# Altium PCB Cotton Candy -PCB.PcbDoc
Units mm, origin at the board's own origin, x right, y up, seen from the top; angles counter-clockwise.
Board outline 152.4 x 101.6 mm, 2 copper layers (Top Layer, Bottom Layer); 66 components, 58 nets, 277 pads, 0 vias.
Unrouted connection lines stored in the file: 172.
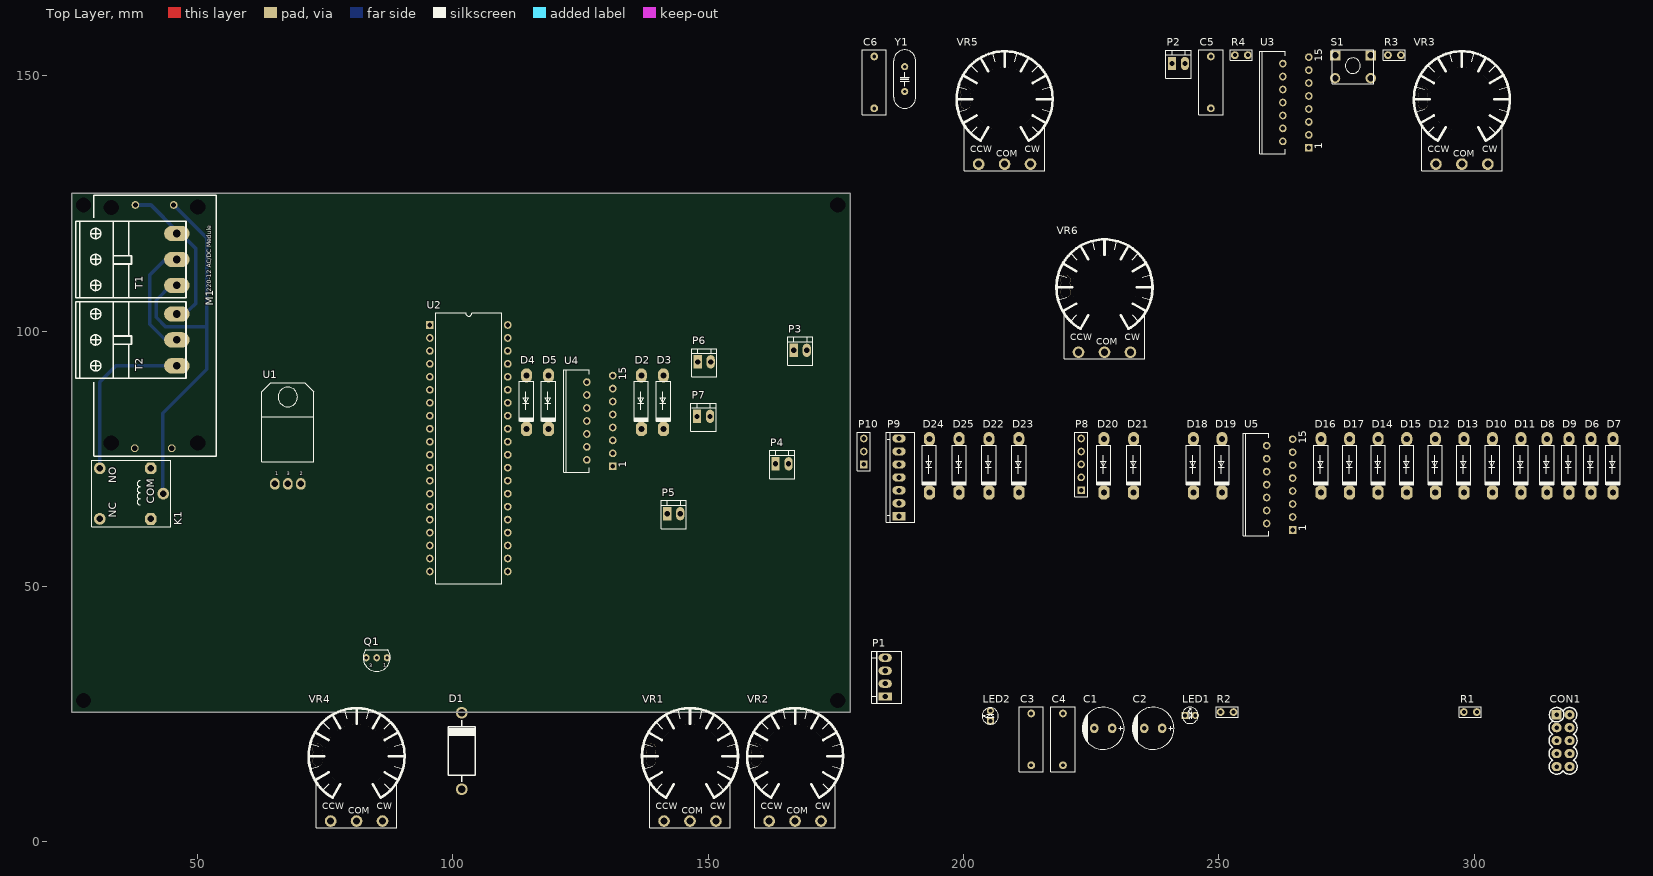
[diagram p0: Top Layer view]
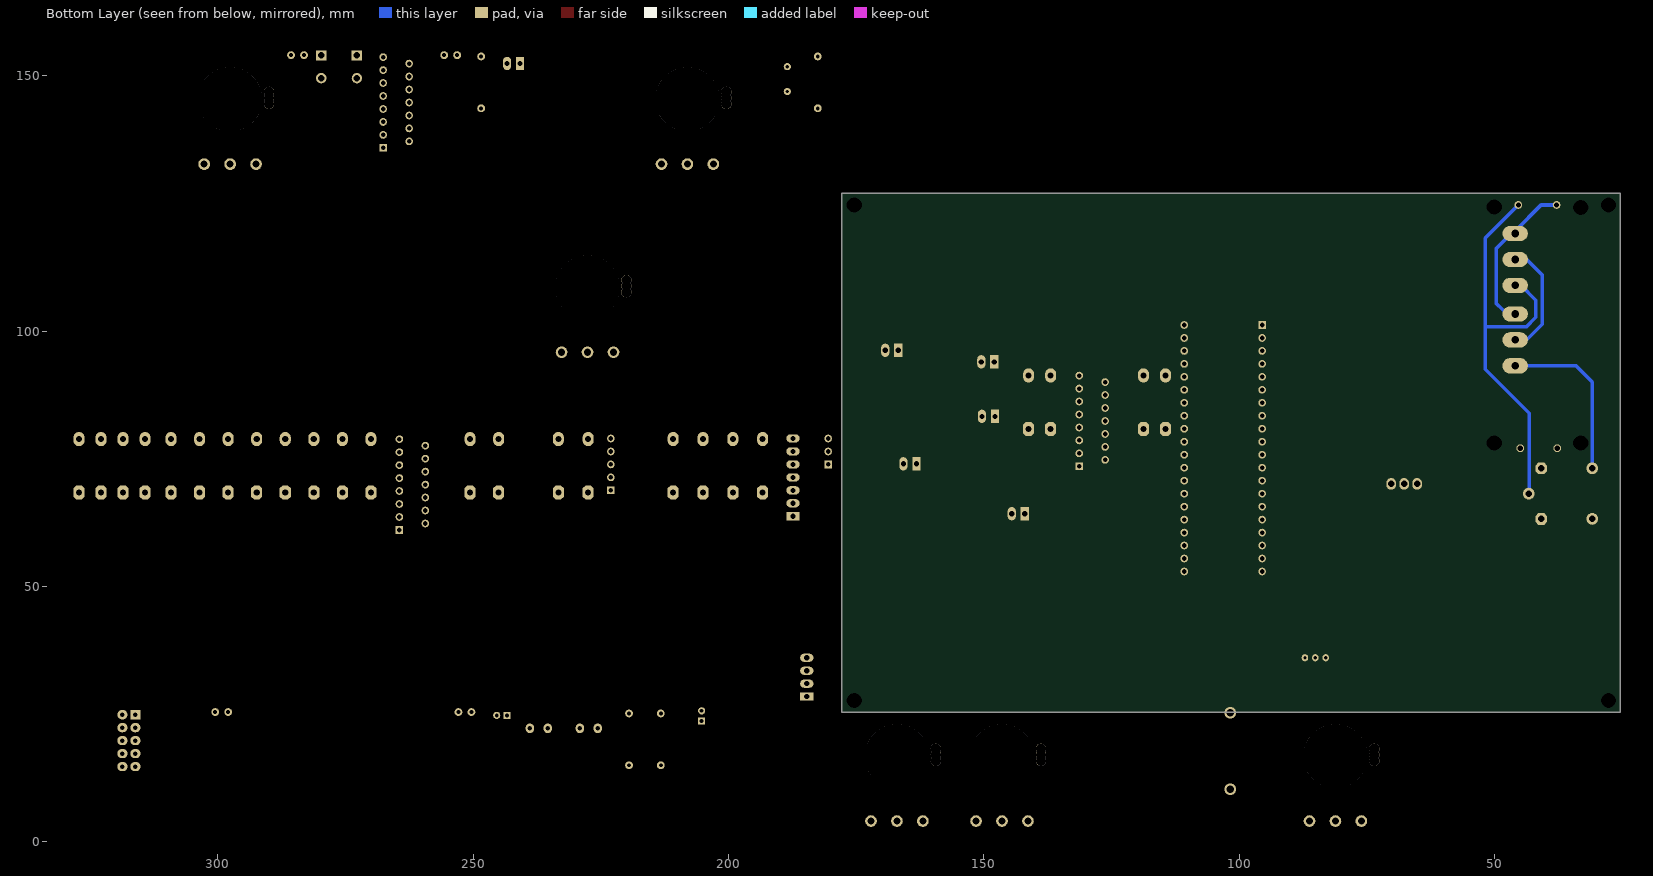
[diagram p1: Bottom Layer view, seen from below]

## Layer stack, top to bottom
Top Solder: solder mask 0.0102, Solder Resist, Dk 3.5
Top Layer: signal copper 0.0356
Dielectric 1: dielectric 0.32, FR-4, Dk 4.8
Bottom Layer: signal copper 0.0356
Bottom Solder: solder mask 0.0102, Solder Resist, Dk 3.5

## Board outline
25.4,25.4 177.8,25.4 177.8,127 25.4,127

## Design rules (kind name [scope] priority, off if disabled: settings)
Clearance [All] p1: gap=0.254 ignorepadtopadclearanceinfootprint=FALSE except(0: Arc-Hole Track-Hole SMDPad-Hole THPad-Hole Via-Hole Fill-Hole Poly-Hole Region-Hole Text-Hole)
PolygonConnect [All] p1: connectstyle=Relief reliefconductorwidth=0.254 reliefentries=4 polygonreliefangle="90 Angle" airgapwidth=0.254
RoutingVias [All] p1: holewidth=0.711 width=1.27 viastyle="Through Hole" minholewidth=0.711 minwidth=1.27 maxholewidth=0.711 maxwidth=1.27
SolderMaskExpansion [All] p1: expansion=0.102
Width [All] p1: maxlimit=1 minlimit=0.3 preferedwidth=0.5
30 further rules are at their usual default settings.

## Components (designator, comment, footprint, x,y, rotation, side; value= is the part's Value field where it differs from the comment)
C1 "100uf" "cap 03" 227.33,22.25 r0 top value=100uF
C2 "100uf" "cap 03" 237.109,22.25 r0 top value=100uF
C3 "100nf" "Cap - 10nF - 630V" 213.233,15.011 r90 top value=100nF
C4 "100nf" "Cap - 10nF - 630V" 219.456,15.011 r90 top value=100nF
C5 "22pf" "Cap - 10nF - 630V" 248.412,143.637 r90 top value=18pf
C6 "22pf" "Cap - 10nF - 630V" 182.499,143.637 r90 top value=18pf
CON1 "ISP" IDC2_5 316.103,24.917 r0 top
D1 "1n4007" BYW98 101.727,17.805 r90 top
D2 "" My_DO-41 137.16,80.645 r90 top
D3 "" My_DO-41 141.478,80.645 r90 top
D4 "" My_DO-41 114.681,80.645 r90 top
D5 "" My_DO-41 118.999,80.645 r90 top
D6 "" My_DO-41 323.088,68.199 r90 top
D7 "" My_DO-41 327.406,68.199 r90 top
D8 "" My_DO-41 314.452,68.199 r90 top
D9 "" My_DO-41 318.77,68.199 r90 top
D10 "" My_DO-41 303.784,68.199 r90 top
D11 "" My_DO-41 309.372,68.199 r90 top
D12 "" My_DO-41 292.608,68.199 r90 top
D13 "" My_DO-41 298.196,68.199 r90 top
D14 "" My_DO-41 281.432,68.199 r90 top
D15 "" My_DO-41 287.02,68.199 r90 top
D16 "" My_DO-41 270.256,68.199 r90 top
D17 "" My_DO-41 275.844,68.199 r90 top
D18 "" My_DO-41 245.237,68.199 r90 top
D19 "" My_DO-41 250.825,68.199 r90 top
D20 "" My_DO-41 227.711,68.199 r90 top
D21 "" My_DO-41 233.553,68.199 r90 top
D22 "" My_DO-41 205.232,68.199 r90 top
D23 "" My_DO-41 211.074,68.199 r90 top
D24 "" My_DO-41 193.548,68.199 r90 top
D25 "" My_DO-41 199.39,68.199 r90 top
K1 "Relay" "Relay 15.40x12.10x13.10" 43.311,68.202 r90 top
LED1 "red" LED-3mm 244.348,24.79 r0 top
LED2 "Yellow" LED-3mm 205.232,24.663 r90 top
M1 "220-12 Medule" "AC-DC 220-12" 29.718,126.746 r270 top
P1 "LHWR" "Polarized Header 4" 184.458,32.288 r90 top
P2 "" "Polarized Header 2" 242.062,152.654 r0 top
P3 "" "Polarized Header 2" 168.031,96.496 r0 top
P4 "" "Polarized Header 2" 164.475,74.271 r0 top
P5 "" "Polarized Header 2" 143.266,64.492 r0 top
P6 "" "Polarized Header 2" 149.225,94.234 r0 top
P7 "" "Polarized Header 2" 149.098,83.566 r0 top
P8 "Header 5" HDR1X5 223.012,68.834 r90 top
P9 "LHWR" "Polarized Header 7" 186.944,71.374 r90 top
P10 "Header 3" HDR1X3 180.467,73.914 r90 top
Q1 "C945" C945 85.09,36.068 r0 top
R1 "330R" Res-(1/4)-Stand 297.942,25.425 r0 top
R2 "330" Res-(1/4)-Stand 250.317,25.425 r0 top
R3 "10K" Res-(1/4)-Stand 283.083,154.051 r0 top
R4 "10K" Res-(1/4)-Stand 253.111,154.051 r0 top
S1 "Switch PB" "Switch - Push to On" 276.225,151.765 r0 top
T1 "PHONIX3" PHONIX3 45.974,108.966 r90 top
T2 "PHONIX3" PHONIX3 45.974,93.218 r90 top
U1 "L78XXCV" "78XXCV - Right" 67.691,70.104 r0 top
U2 "ATmega16-16PI" 40P6 103.124,77.089 r270 top
U3 "L298N" Multiwatt15V 265.049,144.78 r90 top
U4 "L298N" Multiwatt15V 128.778,82.423 r90 top
U5 "L298N" Multiwatt15V 261.874,69.977 r90 top
VR1 "10K" "Setpoint POT" 146.431,16.789 r0 top
VR2 "10K" "Setpoint POT" 167.005,16.789 r0 top
VR3 "10K" "Setpoint POT" 297.561,145.415 r0 top
VR4 "10K" "Setpoint POT" 81.153,16.789 r0 top
VR5 "10K" "Setpoint POT" 208.026,145.415 r0 top
VR6 "10K" "Setpoint POT" 227.584,108.585 r0 top
Y1 "8Mhz" "XTAL Small" 188.468,149.352 r90 top

## Footprints (in the part's own frame and the unit in brackets; to place one, negate y for a bottom-side part, rotate by r counter-clockwise, add the part's x,y. Pads: shape width x height; smd on the part's side, far side on the other; paste and mask are expansions set on the pad)
40P6 [mm] "DIP; 40 Leads; Row Spacing 15.24 mm; Pitch 2.54 mm"
  rect 1.5x1.5 hole 0.9: 1(-24.13,-7.62)
  round 1.5 hole 0.9: 2(-21.59,-7.62) 3(-19.05,-7.62) 4(-16.51,-7.62) 5(-13.97,-7.62) 6(-11.43,-7.62) 7(-8.89,-7.62) 8(-6.35,-7.62) 9(-3.81,-7.62) 10(-1.27,-7.62) 11(1.27,-7.62) 12(3.81,-7.62) 13(6.35,-7.62) 14(8.89,-7.62) 15(11.43,-7.62) 16(13.97,-7.62) 17(16.51,-7.62) 18(19.05,-7.62) 19(21.59,-7.62) 20(24.13,-7.62) 21(24.13,7.62) 22(21.59,7.62) 23(19.05,7.62) 24(16.51,7.62) 25(13.97,7.62) 26(11.43,7.62) 27(8.89,7.62) 28(6.35,7.62) 29(3.81,7.62) 30(1.27,7.62) 31(-1.27,7.62) 32(-3.81,7.62) 33(-6.35,7.62) 34(-8.89,7.62) 35(-11.43,7.62) 36(-13.97,7.62) 37(-16.51,7.62) 38(-19.05,7.62) 39(-21.59,7.62) 40(-24.13,7.62)
  silkscreen extent -26.5,-6.45 26.5,6.45
"78XXCV - Right" [mil] "Right Angle"
  oval 75x90 hole 50: 1(-100,0) 2(100,0) 3(0,0)
  silkscreen extent -201,170 200,780, body extent -198,-8 202,776, height 175
"AC-DC 220-12" [mil]
  round 60 hole 39.37: 0(1955,600) 1(1955,315) 2(80,615) 3(80,320)
  round 60 hole 118.11: 4(1915,135) 5(1915,800) 6(95,800) 7(100,135)
  body extent 6,-5 2014,940, height 118
BYW98 [mil]
  round 90 hole 57: 1(-295,0) 2(295,0)
  silkscreen extent -236,-105 236,105, body extent -320,-106 321,103, height 254
C945 [mil] "NPN Transistor"
  oval 50x55 hole 25: 1(80,0) 2(0,0) 3(-80,0)
  silkscreen extent -105,-105 105,61, body extent -94,-96 95,58, height 315
"cap 03" [mil]
  oval 65x75 hole 35: 1(68.9,0) 2(-68.9,0)
  silkscreen extent -161,-161 161,161, body extent -159,-159 157,158, height 473
"Cap - 10nF - 630V" [mil]
  round 60 hole 30: 1(0,0) 2(400,0)
  silkscreen extent -51,-95 451,93, body extent -51,-95 451,93, height 480
HDR1X3 [mm] "Connector; Header; 3 Position"
  rect 1.5x1.5 hole 0.9: 1(0,0)
  round 1.5 hole 0.9: 2(2.54,0) 3(5.08,0)
  silkscreen extent -1.27,-1.27 6.35,1.27
HDR1X5 [mm] "Connector; Header; 5 Position"
  rect 1.5x1.5 hole 0.9: 1(0,0)
  round 1.5 hole 0.9: 2(2.54,0) 3(5.08,0) 4(7.62,0) 5(10.16,0)
  silkscreen extent -1.27,-1.27 11.43,1.27
IDC2_5 [mm]
  rect 2x1.8 hole 0.9: 1(0,0)
  oval 2x1.8 hole 0.9: 2(2.54,0) 3(0,-2.54) 4(2.54,-2.54) 5(0,-5.08) 6(2.54,-5.08) 7(0,-7.62) 8(2.54,-7.62) 9(0,-10.16) 10(2.54,-10.16)
  silkscreen extent -1.48,-11.64 4.02,1.42
LED-3mm [mil]
  rect 55x55 hole 30: 1(-40,0)
  round 55 hole 30: 2(40,0)
  silkscreen extent -63,-63 63,63, body extent -69,-69 69,69, height 154
Multiwatt15V [mm] "TO, Thru-Hole, Vertical, Heatsink Mounted; 15 Bent Staggered Leads; Pitch 1.27 mm"
  rect 1.5x1.5 hole 0.9: 1(-8.89,-2.54)
  round 1.5 hole 0.9: 2(-7.62,2.54) 3(-6.35,-2.54) 4(-5.08,2.54) 5(-3.81,-2.54) 6(-2.54,2.54) 7(-1.27,-2.54) 8(0,2.54) 9(1.27,-2.54) 10(2.54,2.54) 11(3.81,-2.54) 12(5.08,2.54) 13(6.35,-2.54) 14(7.62,2.54) 15(8.89,-2.54)
  silkscreen extent -10,2.09 10,7.09
My_DO-41 [mil]
  oval 110x85 hole 47.24: A(420.71,10)
  oct 110x85 hole 47.24: K(8.9,10)
  silkscreen extent 64,-45 375,65
PHONIX3 [mm]
  oval 3x5 hole 1.5: 1(0,0) 2(5.08,0) 3(10.16,0)
  silkscreen extent -2.41,-1.78 12.57,19.81
"Polarized Header 2" [mm]
  rect 1.6x2.6 hole 1: 1(-1.28,-0.23)
  oval 1.6x2.6 hole 1: 2(1.26,-0.23)
  silkscreen extent -2.47,-3.15 2.48,2.37, body extent -2.57,-3.43 2.51,2.37, height 10.75
"Polarized Header 4" [mm]
  rect 1.6x2.6 hole 1: 1(-3.84,-0.2)
  oval 1.6x2.6 hole 1: 2(-1.3,-0.2) 3(1.24,-0.2) 4(3.78,-0.2)
  silkscreen extent -5.1,-3.42 5.05,2.45, body extent -5.06,-3.42 5.1,2.38, height 10.75
"Polarized Header 7" [mm]
  rect 1.6x2.6 hole 1: 1(-7.605,-0.405)
  oval 1.6x2.6 hole 1: 2(-5.065,-0.405) 3(-2.525,-0.405) 4(0.015,-0.405) 5(2.555,-0.405) 6(5.095,-0.405) 7(7.635,-0.405)
  silkscreen extent -8.75,-3.52 8.85,2.07, body extent -8.84,-3.62 8.94,2.17, height 10.75
"Relay 15.40x12.10x13.10" [mm]
  round 2.3 hole 1.3: 1(0,0) 2(-4.95,12.45) 3(4.95,12.45)
  oct 2.3x2.3 hole 1.3: 4(-4.95,2.45) 5(4.95,2.45)
  silkscreen extent -6.45,-1.5 6.5,14, body extent -6.05,-1.3 6.05,14, height 15.6
Res-(1/4)-Stand [mil]
  round 60 hole 30: 1(0,0) 2(100,0)
  silkscreen extent -35,-40 135,40, body extent -35,-35 111,37, height 287
"Setpoint POT" [mil]
  round 90 hole 55: 1(-200,-500) 2(200,-500) 3(0,-500)
  round 78.74 hole 78.74: S(-300,-37) S(-300,10) S(-300,57)
  round 492.13 hole 500: S(0,0)
  silkscreen extent -370,-550 370,370, body extent -310,-661 310,308, height 1728
"Switch - Push to On" [mil]
  rect 80x80 hole 50: 1(-137.5,87.5) 1(137.5,87.5)
  round 80 hole 50: 2(-137.5,-87.5) 2(137.5,-87.5)
  silkscreen extent -160,-130 160,130, body extent -155,-121 157,123, height 205
"XTAL Small" [mil]
  round 55 hole 25: 1(-96.06,0) 2(96.06,0)
  silkscreen extent -225,-85 225,85, body extent -226,-89 226,89, height 140

## Part data
C1 C2: library part Cap-Polar, "Polar Capacitor", Voltage=16V, Adding Date=1387/12/20, Designer="Saeid Jorablo", Organazation=ControTec
C3 C4 C5 C6: library part Cap-Bipolar, "Bipolar Capacitor", Voltage=100V, Adding Date=1387/12/20, Designer="Saeid Jorablo", Organazation=ControTec
D1: library part BYW98, "HIGH EFFICIENCY FAST RECOVERY RECTIFIER DIODES", Adding Date=1387/01/10, Company=ControTEK, Designer="Saeid Jorablo", IF(av)="3 A", Trr (max)="35 ns", Vrrm="200 V"
D2 D3 D4 D5 D6 D7 D8 D9 D10 D11 D12 D13 D14 D15 D16 D17 D18 D19 D20 D21 D22 D23 D24 D25: library part 1N4007, "1 Amp Diode"
K1: "SPDT Relay", Company=E.P.I.L, Design_Date=2011/10/31, Designer="Eng. Saeid Jorablo"
LED1 LED2: library part LED, "LED", Adding Date=1387/12/22, Designer="Saeid Jorablo", Organazation=ControTec
P1: library part "4pin LHWR", Designer="Hamed Jafarzadeh - www.R2T.ir"
P2 P3 P4 P5 P6 P7: library part "2pin LHWR", Designer="Hamed Jafarzadeh - www.R2T.ir"
P8: "Header, 5-Pin", LatestRevisionDate=17-Jul-2002, LatestRevisionNote="Re-released for DXP Platform.", Publisher="Altium Limited"
P9: library part "7pin LHWR", Designer="Hamed Jafarzadeh - www.R2T.ir"
P10: "Header, 3-Pin", LatestRevisionDate=17-Jul-2002, LatestRevisionNote="Re-released for DXP Platform.", Publisher="Altium Limited"
Q1: "NPN Transistor", Company="IPA CO", Designer="Saeid Jorablo", Last Update Time=2008/08/04
R1: library part Resistor
R2: library part Resistor, "330R"
R3 R4: library part Resistor, "Resistor"
S1: "Push Button Switch"
U1: "Fixed Voltage Regulator", Adding Date=1387/01/06, Company=ControTec, Designer="Saeid Jorablo"
U2: "8-Bit AVR Microcontroller with 16K Bytes of In-System Programmable Flash Memory", ComponentLink1Description="Manufacturer Link", ComponentLink1URL=http://www.atmel.com, ComponentLink2Description=Datasheet, ComponentLink2URL=http://www.atmel.com/dyn/resources/prod_documents/doc2466.pdf, DatasheetVersion=2466E-AVR-10/02, LatestRevisionDate=04-Mar-2005, LatestRevisionNote="Stylized 3D Model Added.", PackageDescription="DIP; 40 Leads; Row Spacing 15.24 mm; Pitch 2.54 mm", PackageReference=40P6, PackageVersion=Dec-1999, Published=17-Sep-2003, Publisher="Altium Limited"
U3 U4 U5: "Dual Full Bridge Driver", Package Information="Latest Revision: Apr-1998", Package Reference=Multiwatt15H, Datasheet="Latest Revision: Jul-1999", Published=8-Jun-2000, Publisher="Altium Limited", Revision 1="24-Aug-2001: Footprint Added.", Revision 2="17-Jul-2002: Re-released for DXP Platform."
VR1 VR2 VR3 VR4 VR5 VR6: library part "Setpoint V", "Variable Resistor", Designer="Saeid Jorablo"
Y1: library part XTAL, "XTAL Crystal", Company=E.P.I.L, Design Date=11/04/2011

## Free pads (board coordinates)
  round 1.524 hole 3: 1(27.686,124.714) 2(175.387,124.714) 3(175.387,27.686) 4(27.686,27.686)

## Nets (pads, with @x,y where several pads share a name; then routed paths per layer and width w, separated by ;. In a path a pad name is that pad's centre, name@x,y a point inside that pad or via, vN(x,y) a via of type N, cw(c..) or ccw(c..) an arc to the next point about the centre after c; other vN are vias at no path point)
+12: C1.1 C3.1 D8.K D9.K D14.K D15.K D16.K D17.K D20.K D21.K D22.K D23.K D24.K D25.K M1.0 U1.1 U3.4 U3.9 U4.4 U4.9 U5.4 U5.9
ERTH: T1.2 T2.2 | length 22.8
  Bottom Layer w0.7: T2.2 43.688,98.298 40.64,101.346 40.64,110.998 43.688,114.046 T1.2
GND: C1.2 C2.2 C3.2 C4.2 C5.2 C6.2 CON1.4 CON1.6 CON1.8 CON1.10 D2.A D3.A D4.A D5.A D6.A D7.A D10.A D11.A D12.A D13.A D18.A D19.A LED1.2 LED2.2 M1.1 P1.1 P8.1 P10.1 Q1.1 S1.1 U1.3 U2.11 U2.31 U3.1 U3.8 U3.15 U4.1 U4.8 U4.15 U5.1 U5.8 U5.15 VR1.1 VR2.1 VR3.1 VR4.1 VR5.1 VR6.1
Heater: K1.3 T2.1 | length 33.5
  Bottom Layer w0.7: K1.3@31.275,73.146 30.861,73.56 30.861,90.043 34.036,93.218 T2.1
Heater-Trig: R3.1 U2.1
INT0: P1.2 U2.16
INT1: P1.3 U2.17
L: K1.1 M1.2 T1.1 | length 82.3
  Bottom Layer w0.7: K1.1@43.725,68.196 43.18,68.741 43.18,83.947 51.816,92.583 51.816,100.838 ; M1.2 51.816,118.237 51.816,100.838 ; T1.1 44.831,108.966 41.91,106.045 41.91,102.743 43.815,100.838 51.816,100.838
MISO: CON1.9 U2.7 U4.7
MN1: U2.5 U3.7
MN2: CON1.1 U2.6 U3.12
MN4: CON1.7 U2.8 U4.12
MN5: U2.14 U5.7
MN6: U2.15 U5.12
MOa1: D3.K D9.A P2.1 U3.2
MOa2: D5.K D15.A P3.1 U3.13
MOa3: D7.K D17.A P4.1 U4.2
MOa4: D11.K D21.A P5.1 U4.13
MOa5: D13.K D25.A P6.1 U5.2
MOa6: D19.K D23.A P7.1 U5.13
MOb1: D2.K D8.A P2.2 U3.3
MOb2: D4.K D14.A P3.2 U3.14
MOb3: D6.K D16.A P4.2 U4.3
MOb4: D10.K D20.A P5.2 U4.14
MOb5: D12.K D24.A P6.2 U5.3
MOb6: D18.K D22.A P7.2 U5.14
MOTOR1: U2.40 VR1.3
MOTOR2: U2.39 VR2.3
MOTOR3: U2.38 VR3.3
MOTOR4: U2.37 VR4.3
MOTOR5: U2.36 VR5.3
MOTOR6: U2.35 VR6.3
MP1: U2.24 U3.5
MP2: U2.25 U3.10
MP3: U2.26 U4.5
MP4: U2.27 U4.10
MP5: U2.28 U5.5
MP6: U2.29 U5.10
N: M1.3 T1.3 T2.3 | length 31
  Bottom Layer w0.7: M1.3 40.894,124.714 45.974,119.634 T1.3 46.736,119.126 49.657,116.205 49.657,105.41 48.514,104.267 48.485,104.267 47.596,103.378 T2.3
NetC2_1: C2.1 C4.1 R1.1 U1.2
NetC5_1: C5.1 U2.12 Y1.2
NetC6_1: C6.1 U2.13 Y1.1
NetCON1_3: CON1.3 R2.2
NetD1_1: D1.1 K1.4 Q1.2
NetLED1_1: LED1.1 R1.2
NetLED2_1: LED2.1 R2.1
NetP9_3: P9.3 P10.2
NetQ1_3: Q1.3 R3.2
PWM1: U2.4 U3.6
PWM2: U2.19 U3.11
PWM3: U2.18 U4.6
PWM4: U2.21 U4.11
PWM5: U2.3 U5.6
PWM6: U2.2 U5.11
RST: CON1.5 R4.1 S1.2 U2.9
SCL: P8.3 U2.22
SDA: P8.4 U2.23
VCC: CON1.2 D1.2 K1.5 P1.4 P8.5 P9.2 P9.6 P10.3 R4.2 U2.10 U2.30 U2.32 VR1.2 VR2.2 VR3.2 VR4.2 VR5.2 VR6.2
pads on no net: K1.2 M1.4 M1.5 M1.6 M1.7 P8.2 P9.1 P9.4 P9.5 P9.7 U2.20 U2.33 U2.34 VR1.S VR2.S VR3.S VR4.S VR5.S VR6.S

## Silkscreen, mask and mechanical layers (free items; w line width, h text height)
Top Overlay:
  lines w0.254: 29.705,75.565 53.721,75.565 53.721,126.619 29.718,126.619 29.718,122.174 ; 29.725,75.578 29.725,90.043
  text "220-12 AC/DC Medule" at 52.959,107.696 h1.52 r90

## Text inside footprints (layer, text, board x,y; h text height)
K1: Top Overlay "NC" at 34.091,63.478 h1.5 r90; Top Overlay "NO" at 34.142,70.209 h1.5 r90; Top Overlay "COM" at 41.533,66.17 h1.5 r90
Q1: Top Overlay "1" at 86.385,34.258 h0.7; Top Overlay "3" at 83.617,34.163 h0.7
U1: Top Overlay "3" at 67.437,71.804 h0.7; Top Overlay "2" at 70.002,71.804 h0.7; Top Overlay "1" at 65.278,71.804 h0.7
U3: Top Overlay "15" at 270.214,152.72 h1.5 r90; Top Overlay "1" at 270.214,135.66 h1.5 r90
U4: Top Overlay "15" at 133.943,90.363 h1.5 r90; Top Overlay "1" at 133.943,73.303 h1.5 r90
U5: Top Overlay "15" at 267.039,77.917 h1.5 r90; Top Overlay "1" at 267.039,60.857 h1.5 r90
VR1: Top Overlay "COM" at 144.78,5.537 h1.27; Top Overlay "CW" at 150.368,6.426 h1.27; Top Overlay "CCW" at 139.725,6.426 h1.27
VR2: Top Overlay "COM" at 165.354,5.537 h1.27; Top Overlay "CW" at 170.942,6.426 h1.27; Top Overlay "CCW" at 160.299,6.426 h1.27
VR3: Top Overlay "COM" at 295.91,134.163 h1.27; Top Overlay "CW" at 301.498,135.052 h1.27; Top Overlay "CCW" at 290.855,135.052 h1.27
VR4: Top Overlay "COM" at 79.502,5.537 h1.27; Top Overlay "CW" at 85.09,6.426 h1.27; Top Overlay "CCW" at 74.447,6.426 h1.27
VR5: Top Overlay "COM" at 206.375,134.163 h1.27; Top Overlay "CW" at 211.963,135.052 h1.27; Top Overlay "CCW" at 201.32,135.052 h1.27
VR6: Top Overlay "COM" at 225.933,97.333 h1.27; Top Overlay "CW" at 231.521,98.222 h1.27; Top Overlay "CCW" at 220.878,98.222 h1.27